# Altium PCB PCBProyecto.PcbDoc
Units mil, origin at the board's own origin, x right, y up, seen from the top; angles counter-clockwise.
Board outline 3530 x 3140 mil, 2 copper layers (Top Layer, Bottom Layer); 37 components, 28 nets, 166 pads, 57 vias.
Unrouted connection lines stored in the file: 2.
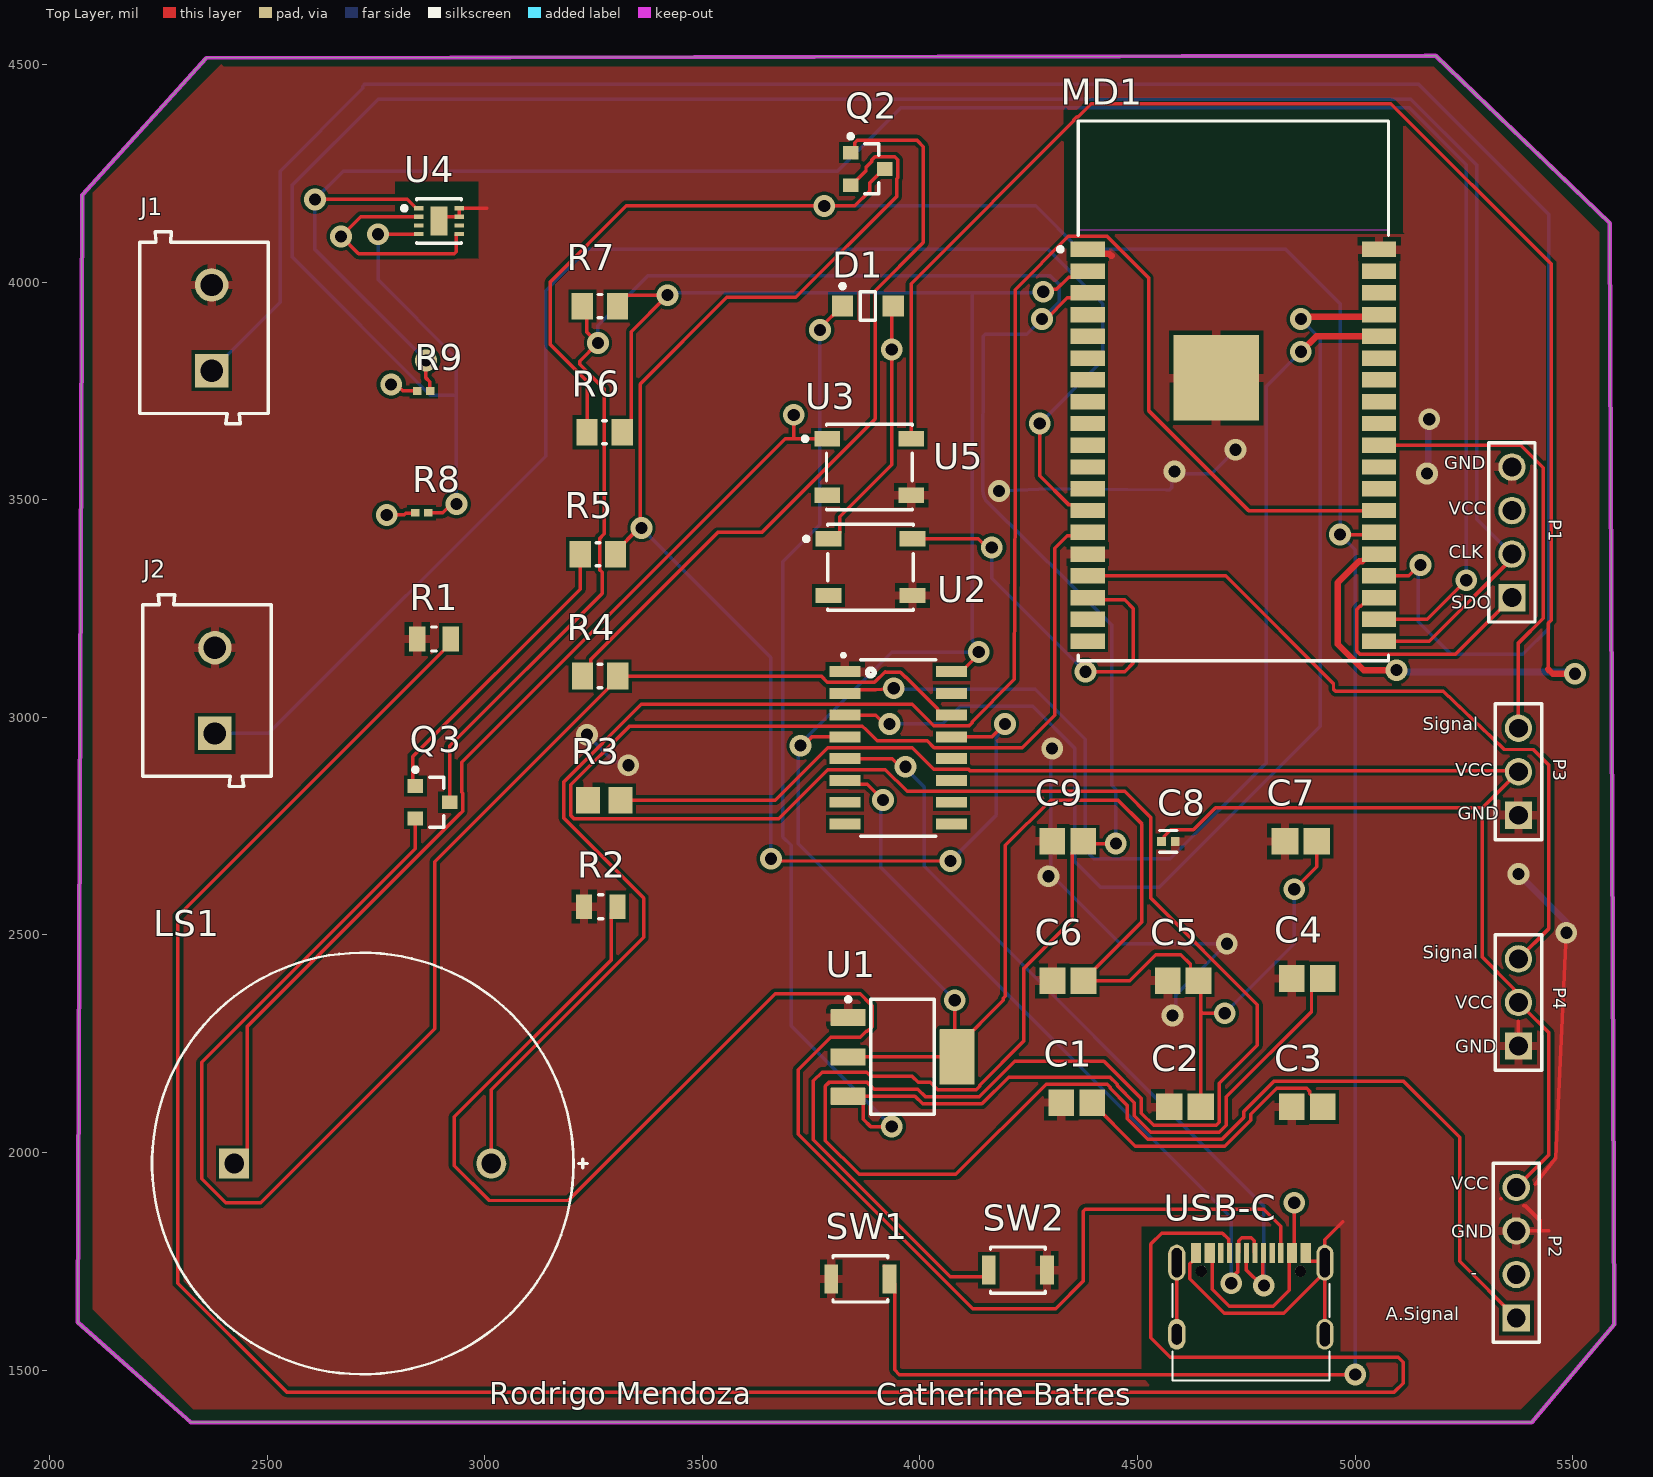
[diagram p0: Top Layer view]
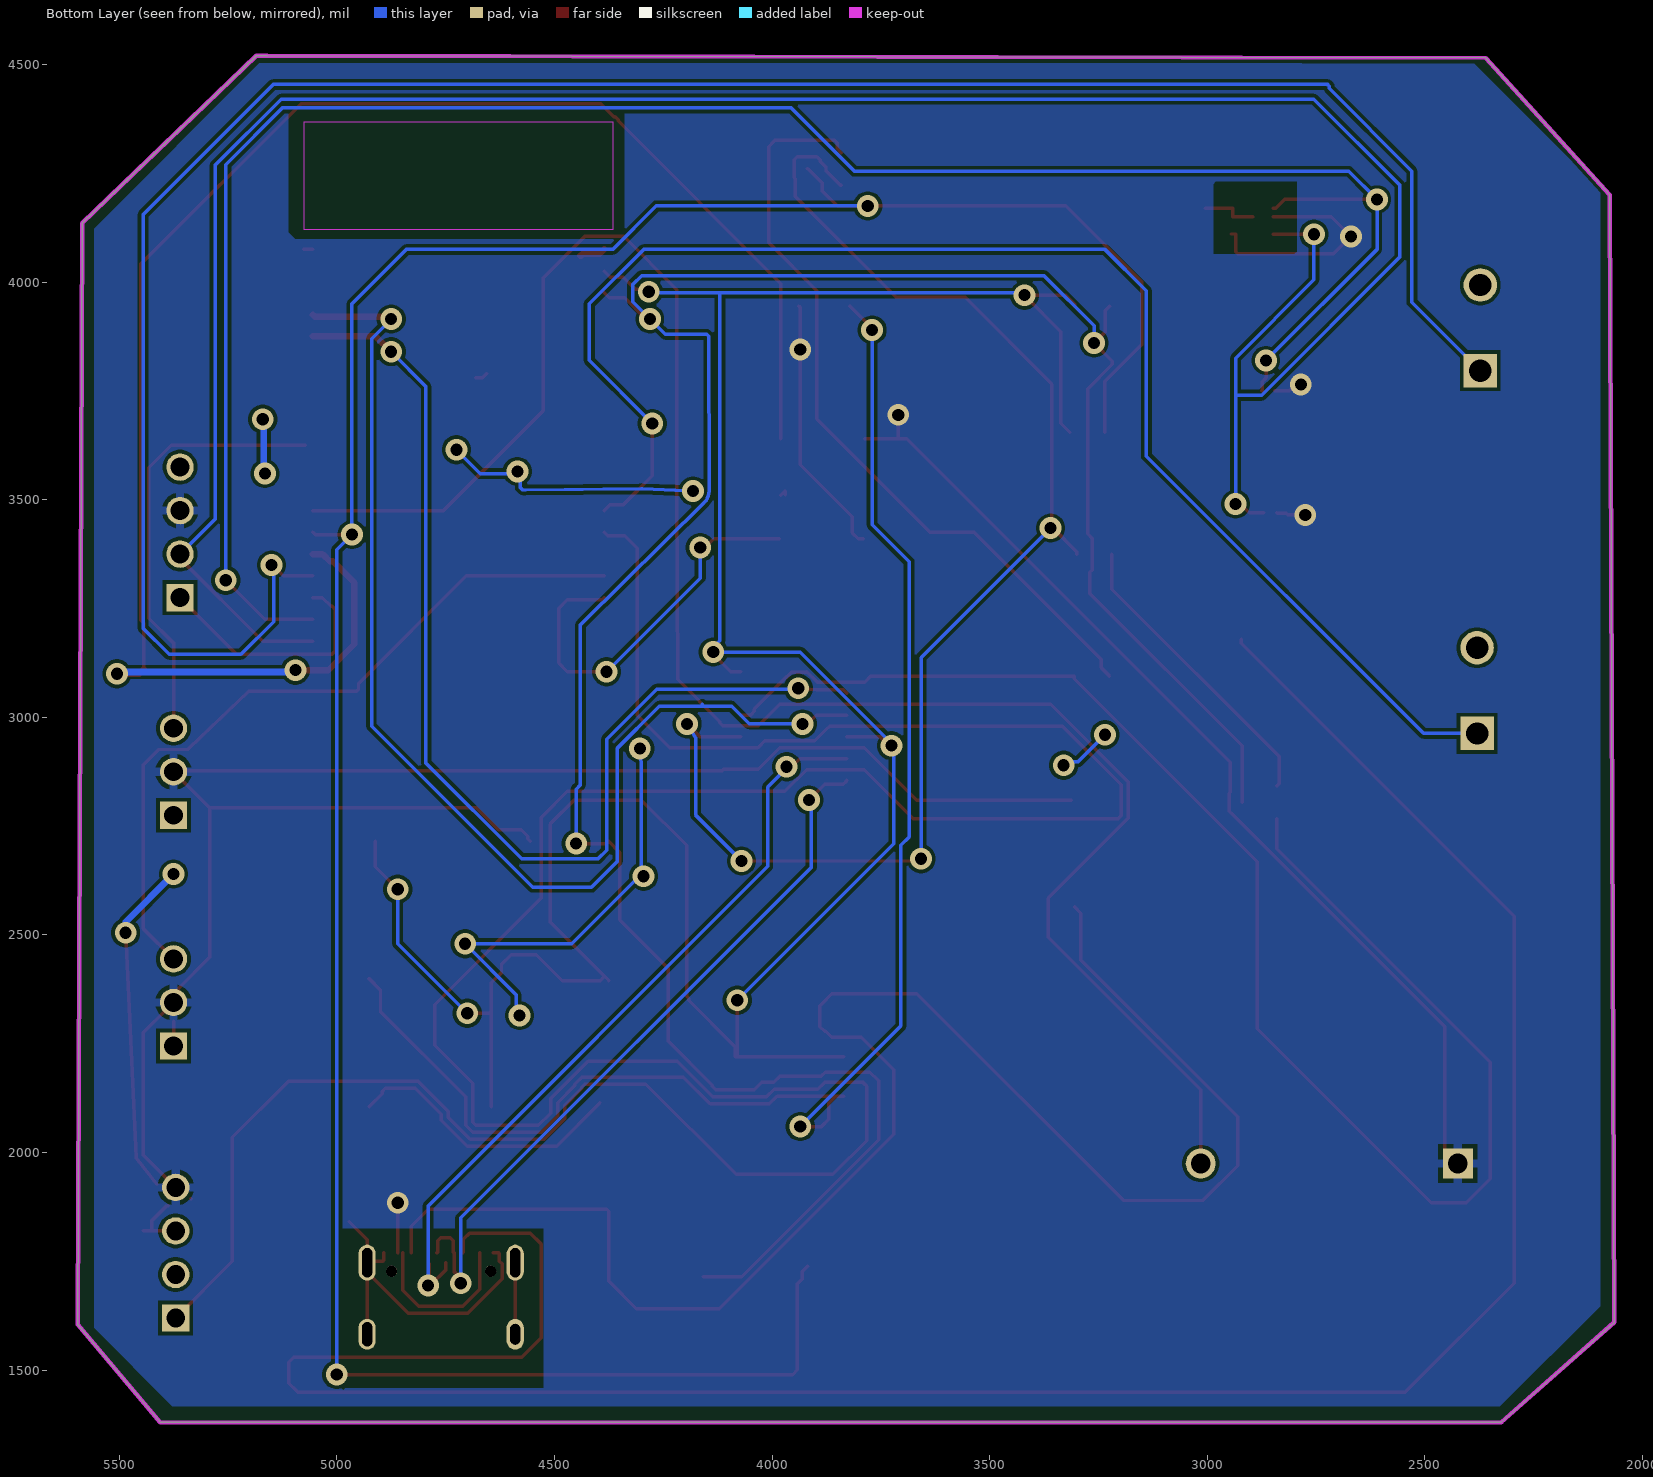
[diagram p1: Bottom Layer view, seen from below]
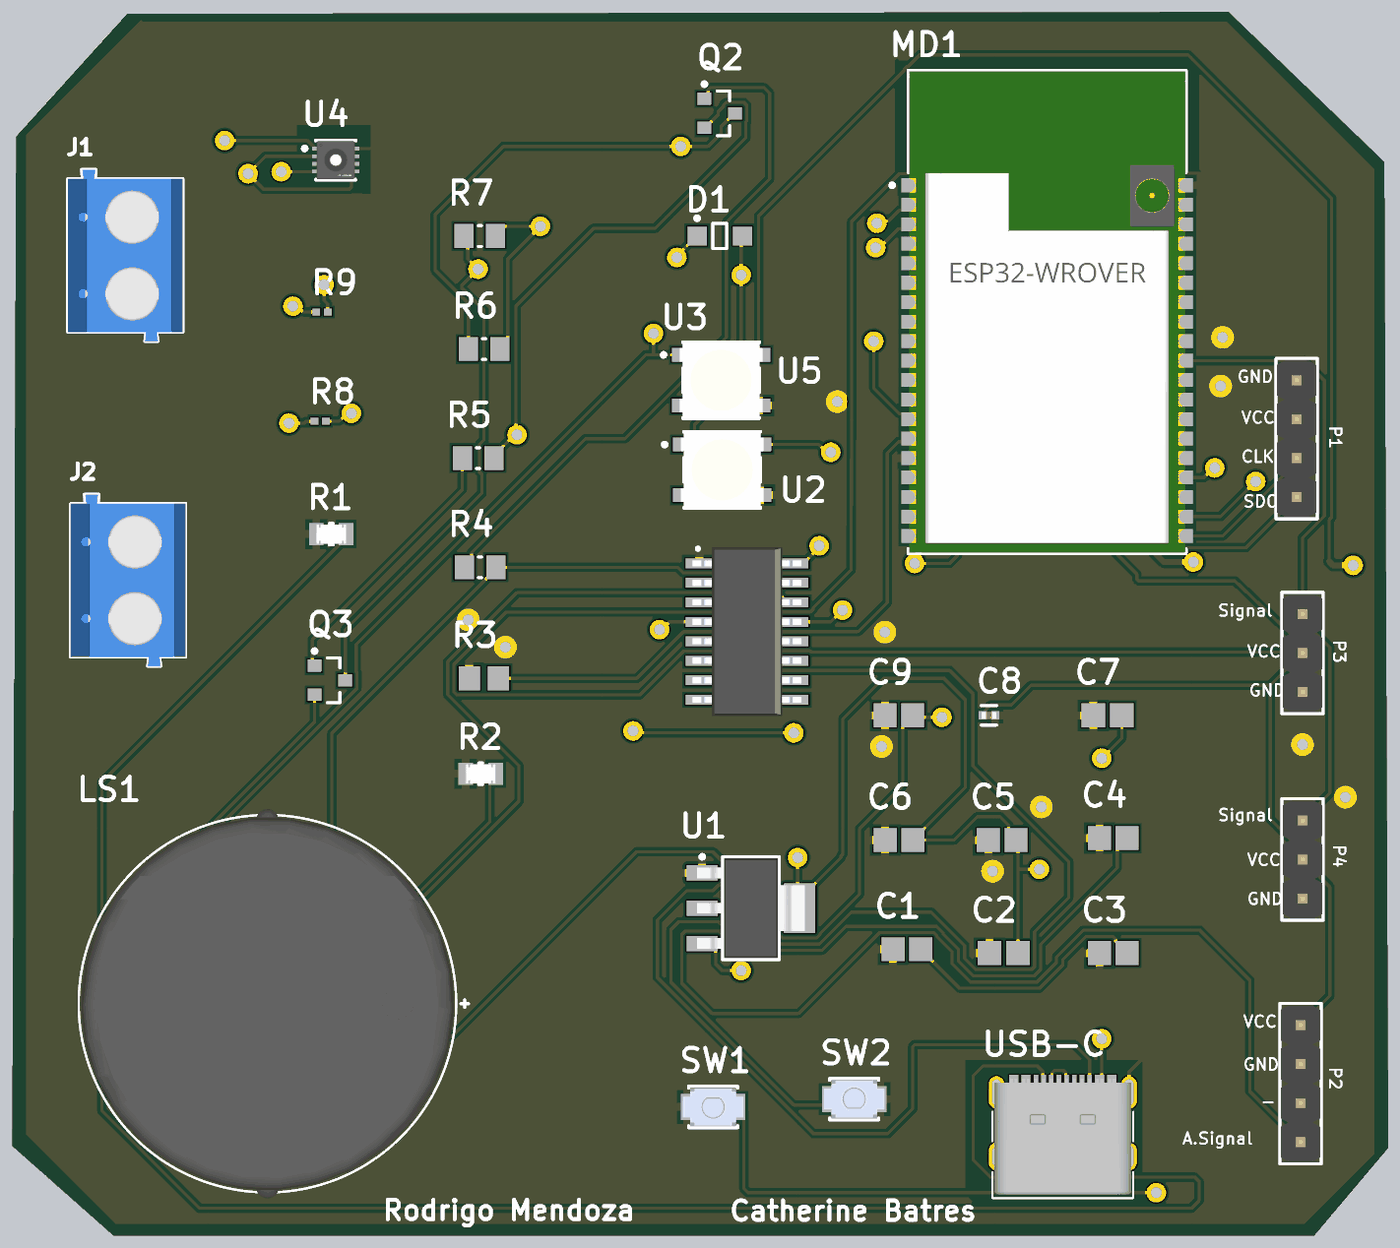
[diagram p2: 3D render of the assembled board from above, using the file's embedded part models]

## Layer stack, top to bottom
Top Solder: solder mask 0.4, Solder Resist, Dk 3.5
Top Layer: signal copper 1.4
Dielectric 1: dielectric 12.6, FR-4, Dk 4.8
Bottom Layer: signal copper 1.4
Bottom Solder: solder mask 0.4, Solder Resist, Dk 3.5

## Board outline
2065,1610 2325,1380 5405,1380 5595,1605 5585,4135 5185,4520 5160,4520 2360,4515 2075,4200

## Design rules (kind name [scope] priority, off if disabled: settings)
BoardOutlineClearance [All] p1: gap=7.87 ignorepadtopadclearanceinfootprint=FALSE except(15.75: Arc-SplitBarrior Arc-SplitContinuation Track-SplitBarrior Track-SplitContinuation SMDPad-SplitBarrior SMDPad-SplitContinuation THPad-SplitBarrior THPad-SplitContinuation Via-SplitBarrior Via-SplitContinuation Fill-SplitBarrior Fill-SplitContinuation Poly-SplitBarrior Poly-SplitContinuation Region-SplitBarrior Region-SplitContinuation Text-SplitBarrior Text-SplitContinuation)
Clearance "Clearance Bottom Layer" [OnLayer('Bottom Layer')] p1: gap=8 ignorepadtopadclearanceinfootprint=TRUE except(10: Arc-Text Track-Text SMDPad-Text THPad-Text Via-Text Fill-Text Poly-Text Region-Text Text-Text)
Clearance "Clearance Top Layer" [OnLayer('Top Layer')] p2: gap=8 ignorepadtopadclearanceinfootprint=TRUE except(10: Arc-Text Track-Text SMDPad-Text THPad-Text Via-Text Fill-Text Poly-Text Region-Text Text-Text)
Clearance [All] p3: gap=7.87 ignorepadtopadclearanceinfootprint=FALSE except(3.5: Arc-Arc Arc-Track Arc-SMDPad Track-Track Track-SMDPad SMDPad-SMDPad; 5: Arc-Via Track-Via SMDPad-Via THPad-Via Via-Via; 10: Arc-Text Track-Text SMDPad-Text THPad-Text Via-Text Fill-Text Poly-Text Region-Text Text-Text)
HoleSize [All] p1: absolutevalues=TRUE maxlimit=248.03 minlimit=7.87 maxpercent=80.000 minpercent=20.000
MinimumAnnularRing [All] p1: minimumring=3
MinimumSolderMaskSliver [All] p1: minsoldermaskwidth=3.94
PolygonConnect PolygonConnect_1 [All] p1: thpad.connectstyle=Relief thpad.reliefconductorwidth=20 thpad.reliefentries=4 thpad.polygonreliefangle="90 Angle" thpad.airgapwidth=10 smdpad.connectstyle=Relief smdpad.reliefconductorwidth=20 smdpad.reliefentries=4 smdpad.polygonreliefangle="90 Angle" smdpad.airgapwidth=10 via.connectstyle=Direct via.reliefconductorwidth=20 via.reliefentries=4 via.polygonreliefangle="90 Angle" via.airgapwidth=10
RoutingCorners [All] p1: cornerstyle=Round minsetback=100 maxsetback=100
RoutingVias [All] p1: holewidth=19.68 width=39.37 viastyle="Through Hole" minholewidth=7.87 minwidth=17.72 maxholewidth=39.37 maxwidth=78.74
SilkToSilkClearance [All] p1: silktosilkclearance=3.94
SilkToSolderMaskClearance [IsPad] p1: minsilkscreentomaskgap=3.94 clearancetoexposedcopper=TRUE
SolderMaskExpansion [All] p1: expansion=4 istentingtop=FALSE
Width [All] p1: maxlimit=100 minlimit=3.5 preferedwidth=15
25 further rules are at their usual default settings.

## Components (designator, comment, footprint, x,y, rotation, side; value= is the part's Value field where it differs from the comment)
C1 "C0805C106K4PACTU" CAPC2013X140X50ML20T25 4360,2115 r0 top
C2 "0.1 uF" CAPC2013X94X50ML20T25 4608.58,2105 r0 top
C3 "C0805C106K4PACTU" CAPC2013X140X50ML20T25 4889.57,2105 r0 top
C4 "10µF" CAPC2013X140X50ML20T25 4889.57,2400 r0 top
C5 "10µF" CAPC2013X140X50ML20T25 4604.57,2395 r0 top
C6 "1µF" CAPC2013X145X50ML20T25 4340,2395 r0 top
C7 "08055C104KAT2A" CAPC2013X94X50ML20T25 4875,2715 r0 top
C8 "C0402C104K8PACTU" FP-C0402-BB-MFG 4570.75,2715 r0 top value="0.10 μF"
C9 "10µF" CAPC2013X145X50ML20T25 4339.57,2715 r0 top
D1 "MBR120ESFT1G" ONSC-SOD-123FL-2-498_V 3880,3945 r0 top
J1 "691102710002" 691102710002 2355,3895 r90 top
J2 "691102710002" 691102710002 2362.28,3061.57 r90 top
LS1 "PKB24SPCH3601-B0" FP-PKB24SPCH3601-B0-MFG 2719.72,1975 r0 top
MD1 "ESP32-WROVER-I" FP-ESP32-WROVER-I-MFG 4720,3750 r0 top
P1 "Pantalla" 61300411121 5360,3425 r90 top
P2 "Humedad Suelo" 61300411121 5370,1770 r90 top
P3 "Nivel" 61300311121 5375,2875 r90 top
P4 "Flujp" 61300311121 5375,2345 r90 top
Q2 "MMBT2222ALT1G" ONSC-SOT-23-3-318-08_V 3880,4260 r0 top
Q3 "MMBT2222ALT1G" ONSC-SOT-23-3-318-08_V 2880,2805 r0 top
R1 "5.1K" FP-CRCW0805-e3-MFG 2883.39,3180 r0 top
R2 "5.1K" FP-CRCW0805-e3-MFG 3266.61,2565 r0 top
R3 "100k" RESC2013X60X40ML20T25 3275,2810 r0 top
R4 "10 k" RESC2013X60X30ML20T20 3265,3095 r0 top
R5 "10 k" RESC2013X60X30ML20T20 3260,3375 r0 top
R6 "10 k" RESC2013X60X30ML20T20 3275.35,3655 r0 top
R7 "10 k" RESC2013X60X30ML20T20 3264.65,3945 r0 top
R8 "10k" RESC1005X40X25LL05T10 2855,3470 r0 top
R9 "10k" RESC1005X40X25LL05T10 2860,3750 r0 top
SW1 "B3U-1000P" FP-B3U-1000P-MFG 3863.07,1710 r0 top
SW2 "B3U-1000P" FP-B3U-1000P-MFG 4225,1730 r180 top
U1 "LM1117MPX-3.3/NOPB" DCY0004A_M 3960,2220 r0 top
U2 "CH340B" CH340B 3950,2930 r0 top
U3 "1655" ADA-RGB-1655_V 3883.54,3575.04 r0 top
U4 "SHT30-DIS-B2.5KS" FP-SHT30-DIS-B2_5KS-MFG 2895,4140 r0 top
U5 "1655" ADA-RGB-1655_V 3886.46,3344.96 r0 top
USB-C "U262-161N-4BVC11" U262-161N-4BVC11 4760,1625 r0 top

## Footprints (in the part's own frame and the unit in brackets; to place one, negate y for a bottom-side part, rotate by r counter-clockwise, add the part's x,y. Pads: shape width x height; smd on the part's side, far side on the other; paste and mask are expansions set on the pad)
61300311121 [mm] "Pin Header, pitch 2.54 mm, THT, Vertical, single row, 3p"
  rect 1.6x1.6 hole 1.1: 1(-2.54,0)
  round 1.6 hole 1.1: 2(0,0) 3(2.54,0)
  silkscreen extent -3.96,-1.35 3.96,1.35, body extent -3.81,-1.27 3.81,1.27, height 8.57
61300411121 [mm] "Pin Header, pitch 2.54 mm, THT, Vertical, single row, 4p"
  rect 1.6x1.6 hole 1.1: 1(-3.81,0)
  round 1.6 hole 1.1: 2(-1.27,0) 3(1.27,0) 4(3.81,0)
  silkscreen extent -5.23,-1.35 5.23,1.35, body extent -5.08,-1.27 5.08,1.27, height 8.57
691102710002 [mm] "5,00mm - modular - blue - Horizontal entry with pressure clamp - 9,9 mm height - 02p"
  rect 1.95x1.95 hole 1.3: 1(-2.5,-0.45)
  round 1.95 hole 1.3: 2(2.5,-0.45)
  silkscreen extent -5.6,-3.75 5.6,3.75, body extent -5.6,-3.75 5.6,3.75, height 9.96
ADA-RGB-1655_V [mm] "SMD, 4-Leads, Body 5x5mm"
  rect 1.5x0.9 smd: 1(-2.45,1.65) 2(-2.45,-1.65) 3(2.45,-1.65) 4(2.45,1.65)
  silkscreen extent -3.87,-2.5 2.5,2.5, body extent -2.7,-2.5 2.7,2.5, height 1.68
CAPC2013X94X50ML20T25 [mm] "Chip Capacitor, 2-Leads, Body 2.01x1.25mm, IPC Low Density"
  rect 1.55x1.55 smd: 1(-0.925,0) 2(0.925,0)
  body extent -1.1,-0.72 1.11,0.72, height 0.94
CAPC2013X140X50ML20T25 [mm] "Chip Capacitor, 2-Leads, Body 2.00x1.25mm, IPC Low Density"
  rect 1.5x1.55 smd: 1(-0.9,0) 2(0.9,0)
  body extent -1.1,-0.72 1.1,0.72, height 1.4
CAPC2013X145X50ML20T25 [mm] "Chip Capacitor, 2-Leads, Body 2.00x1.25mm, IPC Low Density"
  rect 1.5x1.55 smd: 1(-0.9,0) 2(0.9,0)
  body extent -1.1,-0.72 1.1,0.72, height 1.45
CH340B [mm] "- USB 2.0 Transceiver 2Mbps SOP-16_150mil USB ICs ROHS"
  rect 1.8x0.64 smd: 1(-3.105,4.445) 2(-3.105,3.175) 3(-3.105,1.905) 4(-3.105,0.635) 5(-3.105,-0.635) 6(-3.105,-1.905) 7(-3.105,-3.175) 8(-3.105,-4.445) 9(3.105,-4.445) 10(3.105,-3.175) 11(3.105,-1.905) 12(3.105,-0.635) 13(3.105,0.635) 14(3.105,1.905) 15(3.105,3.175) 16(3.105,4.445)
  silkscreen extent -3.3,-5.15 2.2,5.5, body extent -3.56,-5.51 3.56,5.51, height 2.14
DCY0004A_M [mm] "SOT223, 4-Leads, Body 6.7x3.7mm, Pitch 2.3mm, IPC Low Density"
  rrect10% 2.05x1 smd: 1(-3.175,2.3) 2(-3.175,0) 3(-3.175,-2.3)
  rrect5% 2.05x3.25 smd: 4(3.175,0)
  silkscreen extent -3.3,-3.35 1.85,3.47, body extent -3.5,-3.25 3.5,3.25, height 1.62
FP-B3U-1000P-MFG [mm]
  rect 0.8x1.7 smd paste+0 mask+0: 1(-1.7,0) 2(1.7,0)
  silkscreen extent -1.6,-1.35 1.6,1.35, body extent -2.2,-1.45 2.2,1.45, height 0.25
FP-C0402-BB-MFG [mm]
  rect 0.52x0.52 smd paste+0 mask+0: 1(-0.4,0) 2(0.4,0)
  silkscreen extent -0.5,-0.64 0.5,0.64, body extent -0.8,-0.4 0.8,0.4, height 0.25
FP-CRCW0805-e3-MFG [mm]
  rect 0.95x1.45 smd paste+0 mask+0: 1(-0.975,0) 2(0.975,0)
  silkscreen extent -0.13,-0.7 0.13,0.7, body extent -1.55,-0.82 1.55,0.82, height 0.25
FP-ESP32-WROVER-I-MFG [mm]
  rect 2x0.9 smd paste+0 mask+0: 1(-8.5,8.26) 2(-8.5,6.99) 3(-8.5,5.72) 4(-8.5,4.45) 5(-8.5,3.18) 6(-8.5,1.91) 7(-8.5,0.64) 8(-8.5,-0.63) 9(-8.5,-1.9) 10(-8.5,-3.17) 11(-8.5,-4.44) 12(-8.5,-5.71) 13(-8.5,-6.98) 14(-8.5,-8.25) 15(-8.5,-9.52) 16(-8.5,-10.79) 17(-8.5,-12.06) 18(-8.5,-13.33) 19(-8.5,-14.6) 20(8.5,-14.6) 21(8.5,-13.33) 22(8.5,-12.06) 23(8.5,-10.79) 24(8.5,-9.52) 25(8.5,-8.25) 26(8.5,-6.98) 27(8.5,-5.71) 28(8.5,-4.44) 29(8.5,-3.17) 30(8.5,-1.9) 31(8.5,-0.63) 32(8.5,0.64) 33(8.5,1.91) 34(8.5,3.18) 35(8.5,4.45) 36(8.5,5.72) 37(8.5,6.99) 38(8.5,8.26)
  rect 5x5 smd paste+0 mask+0: 39(-1,0.76)
  Keep-Out Layer region: -9,9.4 9,9.4 9,15.7 -9,15.7
  Keep-Out Layer region: -9,9.4 9,9.4 9,15.7 -9,15.7
  silkscreen extent -10.22,-15.75 9.05,15.75, body extent -9.6,-15.85 9.6,15.85, height 0.25
FP-PKB24SPCH3601-B0-MFG [mm]
  rect 1.75x1.75 hole 1.15 paste-1000 mask+0: 1(-7.5,0)
  round 1.75 hole 1.15 paste-1000 mask+0: 2(7.5,0)
  silkscreen extent -12.3,-12.3 13.1,12.3, body extent -12.4,-12.4 12.4,12.4, height 0.25
FP-SHT30-DIS-B2_5KS-MFG [mm]
  rect 0.55x0.25 smd paste-1000 mask-1000: 1(-1.175,0.75) 2(-1.175,0.25) 3(-1.175,-0.25) 4(-1.175,-0.75) 5(1.175,-0.75) 6(1.175,-0.25) 7(1.175,0.25) 8(1.175,0.75)
  rect 1x1.7 smd paste-1000 mask+0: 9(0,0)
  silkscreen extent -2.15,-1.3 1.3,1.3, body extent -1.65,-1.4 1.65,1.4, height 0.25
ONSC-SOD-123FL-2-498_V [mm] "SOD, 2-Leads, Body 2.7x1.65mm"
  rect 1.25x1.22 smd: 1(-1.475,0) 2(1.475,0)
  silkscreen extent -1.6,-0.82 0.45,1.28, body extent -1.35,-0.82 1.35,0.82, height 0.98
ONSC-SOT-23-3-318-08_V [mm] "SOT23, 3-Leads, Body 2.92x1.3mm, Pitch 0.95mm"
  rect 0.9x0.8 smd: 1(-1,0.95) 2(-1,-0.95) 3(1,0)
  silkscreen extent -1.12,-1.46 0.65,2.02, body extent -0.65,-1.46 0.65,1.46, height 1.11
RESC1005X40X25LL05T10 [mm] "Chip Resistor, 2-Leads, Body 1.00x0.50mm, IPC High Density"
  rect 0.5x0.45 smd: 1(-0.375,0) 2(0.375,0)
  body extent -0.53,-0.27 0.53,0.28, height 0.4
RESC2013X60X30ML20T20 [mm] "Chip Resistor, 2-Leads, Body 2.00x1.25mm, IPC Low Density"
  rect 1.25x1.55 smd: 1(-1.025,0) 2(1.025,0)
  silkscreen extent -0.1,-0.67 0.1,0.67, body extent -1.1,-0.72 1.1,0.72, height 0.6
RESC2013X60X40ML20T25 [mm] "Chip Resistor, 2-Leads, Body 2.00x1.25mm, IPC Low Density"
  rect 1.4x1.55 smd: 1(-0.95,0) 2(0.95,0)
  body extent -1.1,-0.72 1.1,0.72, height 0.6
U262-161N-4BVC11 [mm] "USB-C"
  rect 0.3x1.15 smd: A1(-3.35,3.67) A4(-2.55,3.67) A5(-1.25,3.67) A6(-0.25,3.67) A7(0.25,3.67) A8(1.25,3.67) A9(2.55,3.67) A12(3.35,3.67) B1(3.05,3.67) B4(2.25,3.67) B5(1.75,3.67) B6(0.75,3.67) B7(-0.75,3.67) B8(-1.75,3.67) B9(-2.25,3.67) B12(-3.05,3.67)
  rrect100% 1x1.8 hole 1.2 slot 0.6 at 0 deg: S1(-4.32,-1.075)
  rrect100% 1x2.1 hole 1.7 slot 0.6 at 0 deg: S2(-4.32,3.105) S3(4.32,3.105)
  rrect100% 1x1.8 hole 1.4 slot 0.6 at 0 deg: S4(4.32,-1.075)
  round 0.65 hole 0.65: Un1(2.89,2.605) Un2(-2.89,2.605)
  silkscreen extent -4.58,-3.78 4.58,1.85, body extent -4.45,-3.55 4.45,4.01, height 3.33

## Part data
C1 C3 C4 C5: library part CMP-2007-03242-1, "10µF ±10% 16V Ceramic Capacitor X5R 0805 (2012 Metric)", Part Number=CL21A106KOQNNNG
C2 C7: library part CMP-2000-05016-1, "Chip Capacitor, Ceramic, 0.1 uF, 10%, 50 V, 0805, RoHS, Tape and Reel", Capacitance=100nF, Case Size/Dimension=0805, Dielectric=X7R, Manufacturer=AVX, Rated Voltage=50V, Tolerance (%)=±10%, Datasheet URL=http://www.farnell.com/datasheets/319609.pdf, Datasheet Version=Sep-07, Manufacturer URL=http://www.avx.com/
C6: library part CMP-2007-01082-1, "1µF ±10% 16V Ceramic Capacitor X7R 0805 (2012 Metric)", Manufacturer=Kemet, Part Number=C0805C105K4RAC7800
C8: library part CMP-2008-02046-2, "CAP CER 0.1UF 10V X5R 0402", Capacitance="0.10 μF", Manufacturer=Kemet, Package=C0402-BB, Temperature="-55°C to +125°C", Temperature Characteristic=X5R, Temperature Coefficient=15%, Temperature Range High=+125°C, Temperature Range Low=-55°C, Tolerance=0.1, Voltage Rating="10 V", Automotive=No, Category=Cap, ComponentLink2Description=Datasheet, ComponentLink2URL=https://content.kemet.com/datasheets/KEM_C1002_X7R_SMD.pdf, Device Class L1="Passive Components", Device Class L2=Capacitors, Device Class L3="Ceramic Capacitors", Digikey Description="CAP CER 0.1UF 10V X5R 0402", Height=0.55mm, Ipc Land Pattern Name=CAPC10050X50, Lead Free=Yes, Manufacturer Part Number=C0402C104K8PACTU, Material=Ceramic, Mouser Description="Capacitor 100 nF 10 VDC 0402", Octopart=https://octopart.com/c0402c104k8pactu-kemet-140039, RoHS=TRUE
C9: library part CMP-2007-01082-1, "10µF ±10% 16V Ceramic Capacitor X7R 0805 (2012 Metric)", Manufacturer=Kemet, Part Number=C0805C105K4RAC7800
D1: library part CMP-1055-00434-1, "Schottky Power Rectifier, 2-Pin SOD-123, Pb-Free, Tape and Reel", Manufacturer="On Semiconductor", ComponentLink1Description="Manufacturer URL", ComponentLink1URL=http://www.onsemi.com/, ComponentLink2Description=Datasheet, ComponentLink2URL=http://www.onsemi.cn/pub_link/Collateral/MBR120ESFT1-D.PDF, ComponentLink3Description="Package Specification", ComponentLink3URL=http://www.onsemi.com/pub_link/Collateral/498-01.PDF, Configuration=Single, DatasheetVersion="Rev. 4", IFSM Max (A)=40, Mounting Technology="Surface Mount", PackageDescription="2-Pin SOD, Body 1.65 x 2.7 mm", PackageReference=SOD-123FL-2-498, PackageVersion="Rev. D, 05/2013", Packing="Tape and Reel", PartNumber=MBR120ESFT1G, RoHS=TRUE
J1 J2: library part CMP-1502-03258-1, "Series 102 - 5.00 mm Horizontal Entry Modular with Pressure Clamp WR-TBL, 2 pin", Manufacturer="Wurth Elektronik", Operating Temperature=-40to105degC, Datasheet URL=http://katalog.we-online.de/em/datasheet/6911027100xx.pdf, Manufacturer URL=http://www.we-online.de, Mounting Technology=THT, Package Reference=691102710002, Packaging=Box, Part Number=691102710002, Pin Number=2, Pitch=5.00mm, Publisher=WurthElektronik
LS1: library part CMP-06203-000001-2, "AUDIO PIEZO TRANSDUCER 3-15V TH", Frequency=3.6kHz, Max Frequency=4.1kHz, Max Operating Temperature=70°C, Max Supply Current=16mA, Max Supply Voltage=15V, Min Operating Temperature=-20°C, Min Supply Voltage=3V, Nominal Supply Voltage (DC)=12V, Package Quantity=650, Diameter=24.3mm, Height=9.7mm, Lead Free="Lead Free", Length=24.3mm, Max Supply Voltage (DC)=15V, Min Supply Voltage (DC)=3V, Mount=Flush, Nominal Supply Current=16mA, Operating Supply Current=16mA, Packaging=Bulk, Radiation Hardening=No, REACH SVHC="No SVHC", Self Resonant Frequency=3.6kHz, Termination="PC Pins", Voltage Rating=12V, Voltage Rating (DC)=15V, Washable=No
MD1: library part CMP-194065-000001-1, "SMD MODULE, ESP32-D0WDQ6, 32MBIT", Manufacturer=Espressif, Max Frequency=2484MHz, Max Supply Voltage=3.6V, Min Supply Voltage=2.3V, Nominal Supply Current=500mA, Temperature="-40°C to +85°C", Temperature Range High=+85°C, Temperature Range Low=-40°C, Automotive=No, Category=UNK, ComponentLink2Description=Datasheet, ComponentLink2URL=https://www.espressif.com/sites/default/files/documentation/esp32-wrover_datasheet_en.pdf, Data Rate=150Mbits/s, Device Class L1="Integrated Circuits (ICs)", Device Class L2="RF Semiconductors and Devices", Device Class L3=Transceivers, Digikey Description="SMD MODULE, ESP32-D0WDQ6, 32MBIT", Height=3.4mm, Interface=I2C,SPI,UART,I2S,Other, Lead Free=Yes, Manufacturer Part Number=ESP32-WROVER-I, Number Of Adc Channels=16, Number Of Gpio=20, Octopart=https://octopart.com/esp32-wrover-i-espressif+systems-89171349, Package=ESP32-WROVER-I, RoHS=TRUE, Sensitivity=-98dBm
P1 P2: library part CMP-1502-01064-1, "THT Vertical Pin Header WR-PHD, Pitch 2.54 mm, Single Row, 4 pins", Contact Resistance=20mOhm, Manufacturer="Wurth Elektronik", Operating Temperature=-40to105degC, Package Reference=61300411121, Rated Current=3A, Withstanding Voltage=500VAC, Working Voltage=250VAC, Datasheet URL=https://katalog.we-online.de/em/datasheet/6130xx11121.pdf, Gender=Male, Manufacturer URL=http://www.we-online.de, Mounting Technology=THT, Orientation=Vertical, Packaging=Bag, Part Number=61300411121, Pin Number=4, Pitch=2.54mm, Publisher=WurthElektronik, Row Number=Single
P3 P4: library part CMP-1502-01062-1, "THT Vertical Pin Header WR-PHD, Pitch 2.54 mm, Single Row, 3 pins", Contact Resistance=20mOhm, Manufacturer="Wurth Elektronik", Operating Temperature=-40to105degC, Package Reference=61300311121, Rated Current=3A, Withstanding Voltage=500VAC, Working Voltage=250VAC, Datasheet URL=https://katalog.we-online.de/em/datasheet/6130xx11121.pdf, Gender=Male, Manufacturer URL=http://www.we-online.de, Mounting Technology=THT, Orientation=Vertical, Packaging=Bag, Part Number=61300311121, Pin Number=3, Pitch=2.54mm, Publisher=WurthElektronik, Row Number=Single
Q2 Q3: library part CMP-1048-00538-1, "General Purpose Transistor, NPN Silicon, 3-Pin SOT-23, Pb-Free, Tape and Reel", Manufacturer="On Semiconductor", ComponentLink1Description="Manufacturer URL", ComponentLink1URL=http://www.onsemi.com/, ComponentLink2Description=Datasheet, ComponentLink2URL=http://www.onsemi.cn/pub_link/Collateral/MMBT2222LT1-D.PDF, ComponentLink3Description="Package Specification", ComponentLink3URL=http://www.onsemi.cn/pub_link/Collateral/318-08.PDF, DatasheetVersion="Rev. 10", fT Min (MHz)=300, IC Continuous (A)=0.6, Mounting Technology="Surface Mount", PackageDescription="3-Pin Small Outline Transistor, Body 2.92 x 1.3 mm, Pitch 0.95 mm", PackageReference=SOT-23-3-318-08, PackageVersion="Rev. AP, 11/2009", Packing="Tape and Reel", PartNumber=MMBT2222ALT1G, Polarity=NPN, RoHS=TRUE
R1 R2: library part CMP-2001-04024-2, "RES Thick Film, 5.1kΩ, 1%, 0.125W, 100ppm/°C, 0805", Case Code (Imperial)=0805, Case Code (Metric)=2012, Max Operating Temperature=155°C, Max Power Dissipation=125mW, Min Operating Temperature=-55°C, Package Quantity=10, Resistance=5.1kR, Temperature Coefficient=100ppm/°C, Tolerance=1%, Voltage Rating=150V, Case/Package=0805, Composition="Thick Film", Contact Plating=Tin, Depth=1.25mm, Features="Automotive AEC-Q200", Height=0.45mm, Lead Free="Lead Free", Length=2mm, Military Standard=Not, Mount="Surface Mount", Number of Terminations=2, Packaging="Tape and Reel", Power Rating=125mW, Radiation Hardening=No, Termination=SMD/SMT, Voltage Rating (DC)=150V, Weight=0.000194oz, Width=0.049inch
R3: library part CMP-2001-00583-1, "100 kOhms ±0.1% 0.125W, 1/8W Chip Resistor 0805 (2012 Metric) Automotive AEC-Q200 Thin Film", Manufacturer=Panasonic, Part Number=ERA6AEB104V
R4 R5 R6 R7: library part CMP-2001-04657-1, "10 kOhms ±5% 0.25W, 1/4W Chip Resistor 0805 (2012 Metric) Automotive AEC-Q200, Moisture Resistant Thick Film", Manufacturer="KOA Speer", Part Number=RK73B2ATTD103J
R8 R9: library part CMP-2002-07353-1, Manufacturer="Yageo / Phycomp", Part Number=RC0402FR-0710KL
SW1 SW2: library part CMP-2100-03586-2, "SWITCH TACTILE SPST-NO 0.05A 12V", Contact Current Rating=50mA, Contact Resistance=100mR, Insulation Resistance=100MR, Max Operating Temperature=70°C, Max Voltage Rating (DC)=12V, Min Operating Temperature=-25°C, Operating Force=1.5N, Package Quantity=1, Ratings="Dust Proof", Actuator Length=0.4mm, Actuator Type=Standard, Contact Material=Silver, Current Rating=50mA, Depth=2.5mm, Electrical Life=200000Cycles, Height=1.2mm, Illumination Type=Non-Illuminated, Lead Free="Lead Free", Length=4mm, Max Current Rating=50mA, Mechanical Life=200000Cycles, Mount="Surface Mount", Orientation=Straight, Packaging="Tape and Reel", Switch Function=Off-Mom, Switch Travel=0.15mm, Termination=SMD/SMT, Throw Configuration=SPST, Voltage Rating (DC)=12V, Weight=0.000776oz, Width=3mm
U1: library part CMP-0062-01639-4, "800mA Low-Dropout Linear Regulator, 4-pin SOT-223, Pb-Free", Manufacturer="Texas Instruments", PackageTopMarking=XYTT*N05A, PowerWise=N, Code_IPC=SOT223-4, Code_JEDEC=TO-261-AA, ComponentLink1Description="Datasheet URL", ComponentLink1URL=http://www.ti.com/general/docs/lit/getliterature.tsp?genericPartNumber=LM1117-N&fileType=pdf, CompType="LDO IC", High-Reliability=Y, PackageDescription="Molded SOT-223, 6.50 x 3.56 x 1.6mm Body, 4 Lead, 2.3mm Pitch", PackageReference=DCY0004A, PartNumber=LM1117MPX-3.3/NOPB, PinCount=4, RoHS=Y
U2: "- USB 2.0 Transceiver 2Mbps SOP-16_150mil USB ICs ROHS", ComponentLink1Description=Datasheet, ComponentLink1URL=https://www.mpja.com/download/35227cpdata.pdf
U3 U5: library part CMP-2000-05026-1, "Intelligent Control LED Integrated Light Source, 3.5 to 5.3 V, -25 to 80 degC, 4-Pin SMD, RoHS, Tape and Reel", Color=Red,Green,Blue(RGB), Manufacturer=Adafruit-Industries-LLC, Package Description="4-Pin Surface Mount Device, Body 5 x 5 mm", Category=Optoelectronics, Configuration=Discrete, Controller Type=-, Datasheet URL=http://datasheet.octopart.com/ADA1655-Adafruit-Industries-datasheet-32028139.pdf, Datasheet Version=May-13, Family=Addressable,Specialty, Interface=-, Manufacturer URL=https://www.adafruit.com/, Mounting Type=SurfaceMount, Number of LEDs=10, Package Reference=1655, Series=Neopixel, Size / Dimension=5.00mmLx5.00mmW, Utilized LED=WS2812(5050)
U4: library part CMP-144040-000006-1, "SENSOR HUMID/TEMP 5V I2C 3% SMD"
USB-C: "USB - Type C Female 16 SMT USB Connectors RoHS", ComponentLink1Description=datasheet, ComponentLink1URL=https://datasheet.lcsc.com/szlcsc/2002271811_XKB-Connectivity-U262-161N-4BVC11_C319148.pdf, ComponentLink2Description="LCSC Link", ComponentLink2URL=https://lcsc.com/product-detail/USB-Connectors_XKB-Connectivity-U262-161N-4BVC11_C319148.html

## Via types
v1: diameter 50, hole 28, Top Layer to Bottom Layer, 57 vias

## Nets (pads, with @x,y where several pads share a name; then routed paths per layer and width w, separated by ;. In a path a pad name is that pad's centre, name@x,y a point inside that pad or via, vN(x,y) a via of type N, cw(c..) or ccw(c..) an arc to the next point about the centre after c; other vN are vias at no path point)
3V3: C2.2 C5.2 C6.2 C7.2 MD1.2 R6.2 R7.2 U1.2 U1.4 U2.4 U2.16 | length 6599.7
  Top Layer w8: R7.2 3305,3949.39 3325.61,3970 v1(3420,3970) 3336.32,3886.32 3336.32,3675.61 R6.2 ; v1(3725.68,2935) 3731.37,2935 3751.37,2955 U2.4 ; U1.2 U1.4 ; U2.16 4095.08,3105 4135,3144.92 v1(4135,3150) ; v1(4080,2350) 4080,2225 U1.4 ; v1(4283,3978) 4288.66,3983.66 4313.66,3983.66 4341.48,4011.48 4371.64,4011.48 MD1.2 ; C6.2 4375.43,2395.98 4384.72,2405.28 4510,2530.55 4510,2755 4455,2810 4300,2810 4195.91,2705.91 4195.91,2359.22 4191.22,2354.53 4191.22,2349.84 4085,2243.62 U1.4 ; C6.2@4385.22,2404.78 4395,2395 4481.63,2395 4541.63,2455 4599.3,2455 4621.48,2432.83 4621.48,2413.52 4645,2390 4645,2325 ; C2.2 4645,2325 ; v1(4700,2320) 4650,2320 4645,2325 ; v1(4860,2605) 4911.42,2656.42 C7.2
  Bottom Layer w8: v1(3420,3970) 3425,3975 4120,3975 ; v1(4080,2350) 3720,2710 3720,2929.32 v1(3725.68,2935) 3725.68,2940.68 3935,3150 v1(4135,3150) 4135,3160.69 4120,3175.69 4120,3975 ; v1(4283,3978) 4280,3975 4120,3975 ; v1(4700,2320) 4860,2480 v1(4860,2605)
Buzz: LS1.2 MD1.26 | length 4498
  Top Layer w8: LS1.2 3015,1990 3010,1995 3015,2000 3015,2144.5 3365,2494.5 3365,2584.93 3182.04,2767.89 3182.04,2852.11 3359.71,3029.78 3982.46,3029.78 4031.84,2980.4 4112.65,2980.4 4119.68,2987.43 4119.68,2990.26 4214.56,3085.14 4216.9,3087.48 4218.44,3519.8 ccw(c4183.44,3520) 4218.44,3520.12 4218.44,3982.34 4341.01,4104.91 4429.69,4104.91 4436.72,4097.88 4525,4009.61 4525,3705 4754.8,3475.2 MD1.26
"Carga 1": J2.1 MD1.13 | length 3410.9
  Top Layer w8: J2.1@2385.95,2948.86 2385.95,2957.2 J2.1 2388.86,2963.15 J2.1@2397.28,2971.57 ; v1(4275,3675) 4275,3555 4341.09,3488.91 4371.64,3488.91 MD1.13
  Bottom Layer w8: J2.1 2503.15,2963.15 3140,3600 3140,3980 3235,4075 4295,4075 4420,3950 4420,3820 v1(4275,3675)
"Carga 2": J1.1 MD1.23 | length 5191.6
  Top Layer w8: MD1.23 5122.48,3325.2 5147.28,3350 v1(5150,3350)
  Bottom Layer w8: J1.1 2530,3953.86 2530,4255 2720,4445 2720,4450.31 2723.76,4454.07 5145.93,4454.07 5445,4155 5445,3205 5385,3145 5220,3145 5145,3220 5145,3345 v1(5150,3350)
CLK: MD1.20 P1.2 R8.2 U4.4 | length 5722.5
  Top Layer w8: v1(2755,4110) 2755.24,4110.24 2848.5,4110.24 U4.4 ; R8.2 2903.63,3470 2923.63,3490 v1(2935,3490) ; MD1.20 5170.2,3175.2 5360,3365 P1.2
  Bottom Layer w8: v1(2755,4110) 2755,4005 2935,3825 2935,3740 ; v1(2935,3490) 2935,3740 ; P1.2 5279.61,3455.39 5279.61,4268.02 5127.63,4420 2755,4420 2558.31,4223.31 2558.31,4056.69 2875,3740 2935,3740
D+: U2.5 USB-C.A6 USB-C.B6 | length 1800.6
  Top Layer w8: U2.5 3936.46,2905 3955.05,2886.41 v1(3966.41,2886.41) ; 4750,1746.65 4750,1730 4785,1695 v1(4790,1695) 4787.62,1697.38 4787.62,1744.58
  Bottom Layer w8: v1(3966.41,2886.41) 3966.41,2883.59 4010,2840 4010,2657.5 4790,1877.5 v1(4790,1695)
D-: U2.6 USB-C.A7 USB-C.B7 | length 1725.6
  Top Layer w8: U2.6 3836.35,2846.4 3878.6,2846.4 v1(3915,2810) ; v1(4715,1700) 4715,1711.37 4730.47,1726.84 USB-C.B7 4732.25,1771.27 4732.25,1797.1 4739.28,1804.13 4761.03,1804.13 4768.06,1797.1 4768.06,1771.27 USB-C.A7
  Bottom Layer w8: v1(3915,2810) 3910,2805 3910,2655 4715,1850 v1(4715,1700)
DTR: Q2.2 R5.2 U2.13 | length 3217.4
  Top Layer w8: R5.2 3300.35,3380.91 3354.45,3435 v1(3360,3435) 3357.22,3437.78 3357.22,3765.78 3556.33,3964.88 3714.88,3964.88 3947.09,4197.09 3947.09,4237.28 3949.09,4239.28 3949.09,4280.72 3942.06,4287.75 3896.68,4287.75 3889.65,4280.72 3889.65,4277.89 3875.93,4264.17 3875.93,4255.93 3842.6,4222.6 Q2.2 ; v1@3655,2675 v1(3657.5,2675) 3660,2675 3665,2670 v1(4070,2670) ; U2.13 4165,2955 v1(4195,2985)
  Bottom Layer w8: v1(3360,3435) 3657.5,3137.5 v1(3657.5,2675) ; v1(4070,2670) 4175.71,2775.71 4175.71,2946.72 4175.71,2953.35 v1(4195,2985)
Flujo: MD1.16 P4.3 | length 1719.2
  Top Layer w8: MD1.16 4702.11,3325.2 4950,3077.3 4950,3064.69 4954.69,3060 5200,3060 5201.98,3059.67 5340.2,2928.37 5342.52,2926.17 5408.83,2926.17 5445,2890 5445,2515 P4.3
GND: C1.1 C2.1 C3.1 C4.1 C5.1 C6.1 C7.1 C8.2 C9.1 J1.2 J2.2 MD1.1 MD1.15 MD1.38 MD1.39 P1.4 P2.3 P3.1 P4.1 R1.1 R2.1 R3.1 SW1.1 SW2.1 U1.1 U2.1 U3.3 U4.7 U4.8 U4.9 U5.3 USB-C.A1 USB-C.A12 USB-C.B1 USB-C.B12 USB-C.S1 USB-C.S2 USB-C.S3 USB-C.S4 | length 4128.7
  Top Layer w8: J1.2 2365,4001.14 2365,4005 J1.2@2376.57,3993.43 ; U4.9@2895,4150 2895.16,4149.84 U4.7 U4.8 3004.53,4169.53 3005,4170 ; U3.3@3970,3511.89 3970,3520 3979.92,3510.08 U3.3 ; USB-C.S2@4575.43,1770 4589.92,1755.51 USB-C.S2 USB-C.S2@4589.92,1725 ; USB-C.S1 USB-C.S2@4589.92,1725 ; USB-C.S2@4590.3,1725 USB-C.S2@4589.92,1725 ; USB-C.B12 USB-C.A1 4626.2,1767.58 4626.2,1750.85 4620,1744.65 4620,1710.2 4699.2,1631 4835.49,1631 USB-C.S3@4930.08,1725.59 ; MD1.39@4655,3790 4665.08,3779.92 MD1.39 ; USB-C.A12 4891.89,1752.76 4893.8,1750.85 4926.47,1750.85 USB-C.S3 ; USB-C.S4 USB-C.S3@4930.08,1725.59 ; 4971,1841 4930.08,1800.08 USB-C.S3 ; MD1.38 MD1.38@5076.3,4075.2 ; 5334.76,1894.5 5335.03,1894.13 ; P2.3 P2.3@5386,1820 ; P4.1 5375,2301.5 ; P2.3@5376.63,1841 5386,1831.63 P2.3@5386,1820 ; 5387.19,1878.5 5389.98,1878.5 5425.5,1842.99 5425.5,1820 ; 5412.95,1926.89 5461,1988.37 v1(5485,2505) ; 5445,1820 5425.5,1820 ; USB-C.S3@4930.08,1725.59 USB-C.S3 ; P2.3@5386,1820 5425.5,1820
  Top Layer w15: MD1.1 4395.57,4064.98 4435.02,4064.98 4440,4060
  Bottom Layer w8: v1(3235,2960) 3296.96,2898.04 3321.96,2898.04 v1(3330,2890) ; v1(4181.44,3519.99) 4222.44,3521.68 4298.49,3524.97 cw(c4300,3490) 4300.35,3525 4565.72,3522.34 4572.34,3522.34 4578,3528 4578,3558 v1(4585,3565) 4590,3560 4670,3560 v1(4725,3615) ; v1(4303.59,2928.59) 4300,2894.21 4300,2887.59 4300,2640 v1(4295,2635) 4305,2635 4460,2480 v1(4705,2480) 4588.04,2363.04 4588.04,2323.04 v1(4580,2315)
  Bottom Layer w15: v1(5165,3560) 5167.5,3562.5 5167.5,3682.5 v1(5170,3685) ; v1(5375,2640) 5485,2530 v1(5485,2505)
GPIO0: MD1.25 Q2.3 R6.1 SW1.2 | length 6428
  Top Layer w8: R6.1 3235,3771.87 3150,3856.87 3150,4000 3325,4175 v1(3780,4175) 3850,4175 3884.07,4209.07 3884.07,4226.67 3917.4,4260 Q2.3 ; SW1.2@3918.25,1739.46 3930,1727.72 SW1.2 3941.75,1698.25 3941.75,1501.04 3952.79,1490 v1(5000,1490) ; v1(4965,3420) 5049.45,3420 MD1.25
  Bottom Layer w8: v1(3780,4175) 4265.68,4175 4365.68,4075 4840,4075 4965,3950 4965,3411.6 4973.4,3411.6 5000,3385 v1(5000,1490)
Humedad: MD1.14 P2.1 | length 7427.9
  Top Layer w8: MD1.14 4377.63,3417.47 4338.67,3417.47 4310,3388.8 4310,3005 4235,2930 4032.24,2930 4016.24,2946 3901.76,2946 3875.19,2972.57 3867.76,2980 3332.56,2980 3198.04,2845.48 3198.04,2774.52 3205.07,2767.49 3675.24,2767.49 3787.75,2880 3920.5,2880 3970.5,2830 4470,2830 4529.61,2770.39 4529.61,2585.39 4775.03,2339.97 4775.03,2247.01 4687.51,2159.49 4687.51,2069.52 4680.48,2062.49 4536.68,2062.49 4508.27,2090.91 4508.27,2124.43 4422.7,2210 4217.75,2210 4135.77,2128.02 4012.58,2128.02 3995.16,2145.45 3894.86,2145.45 3879.17,2161.13 3790.83,2161.13 3782.65,2152.95 3782.65,2027.35 3860,1950 4082.56,1950 4290.07,2157.51 4429.93,2157.51 4436.96,2150.48 4436.96,2147.65 4476.27,2108.35 4476.27,2077.65 4523.43,2030.49 4693.74,2030.49 4744,2080.75 4744,2094.5 4813.01,2163.51 5111.49,2163.51 5239.68,2035.32 5239.68,1750.32 P2.1
Neo: MD1.24 U3.4 | length 3989.6
  Top Layer w8: U3.4 3980,3996.58 4353.67,4370.25 4353.67,4373.08 4360.7,4380.11 4363.53,4380.11 4393.42,4410 5081.64,4410 5450,4041.64 5450,3223.23 5443.5,3216.73 5443.5,3110 ; v1@5504.23,3100.77 v1(5505,3100)
  Top Layer w15: MD1.24 5032.99,3375.2 5016.21,3358.41 5008.86,3358.41 4960,3309.56 4960,3168.21 5019.73,3108.48 v1(5095,3108.48) ; 5443.5,3110 5453.5,3100 v1(5505,3100)
  Bottom Layer w15: v1(5095,3108.48) 5099.24,3104.24 5500.76,3104.24 v1(5505,3100)
Neo2: MD1.17 U5.4 | length 922.8
  Top Layer w8: U5.4 4133.71,3409.92 4153.63,3390 v1(4165,3390) ; v1(4380,3105) 4470,3105 4490,3125 4490,3250 4470,3270 4390.55,3270 MD1.17
  Bottom Layer w8: v1(4165,3390) 4165,3320 v1(4380,3105)
NetC1_2: C1.2 C3.2 | length 656.1
  Top Layer w8: C1.2 4395.43,2114.02 4494.96,2014.49 4700.36,2014.49 4760,2074.12 4760,2087.88 4819.64,2147.51 4888.63,2147.51 4895.66,2140.48 4895.66,2135.32 4925,2105.98 C3.2
NetC4_2: C4.2 D1.1 U1.3 | length 3587.7
  Top Layer w8: v1(3770,3890) 3770,3893.66 3821.34,3945 D1.1 ; U1.3 U1.3@3853.7,2129.45 ; v1(3935,2060) 3886.37,2060 3869.39,2076.98 3869.39,2113.76 U1.3@3853.7,2129.45 ; C4.2 4925.98,2400 4899.47,2373.49 4899.47,2323.9 4703.51,2127.94 4703.51,2062.89 4687.11,2046.49 4530.06,2046.49 4492.27,2084.28 4492.27,2114.98 4452.96,2154.28 4452.96,2157.11 4436.56,2173.51 4203.89,2173.51 4142.4,2112.02 4005.96,2112.02 3988.53,2129.45 U1.3@3853.7,2129.45
  Bottom Layer w8: v1(3770,3890) 3770,3442.07 3685,3357.07 3685,2725.2 3704,2706.2 3704,2291 v1(3935,2060)
NetQ2_1: Q2.1 R4.1 | length 1792.8
  Top Layer w8: R4.1 3243.07,3113.42 3243.07,3132.67 3535.13,3424.73 3636.03,3424.73 3896.84,3685.53 3896.84,3979.87 4007.91,4090.95 4007.91,4311.25 3993.17,4326 3855.89,4326 3850.35,4320.46 3850.35,4307.13 Q2.1
NetQ3_1: Q3.1 R5.1 | length 694.3
  Top Layer w8: Q3.1 2835,2848.03 2835,2910 3219.65,3294.65 R5.1
NetR1_2: R1.2 USB-C.A5 | length 5760.7
  Top Layer w8: R1.2 2921.77,3170.16 2295,2543.39 2295,1700 2545,1450 5090,1450 5110,1470 5110,1518.37 5098.37,1530 4575,1530 4530,1575 4530,1790 4555,1815 4695,1815 4709.01,1800.99 4709.01,1771.27 USB-C.A5
NetR2_2: R2.2 USB-C.B5 | length 3899.7
  Top Layer w8: R2.2 3290.3,2550.3 3290.3,2442.43 2930,2082.13 2930,1970 3010,1890 3192.07,1890 3667.07,2365 3862.48,2365 3885.24,2342.24 3889.93,2337.55 3889.93,2289.62 3879.17,2278.87 3876.34,2278.87 3862.48,2265 3794.74,2265 3720,2190.26 3720,2042.29 4120.75,1641.54 4311.54,1641.54 4375,1705 4375,1865.31 4379.69,1870 4790,1870 4828.9,1831.1 USB-C.B5
Nivel: MD1.29 P3.3 | length 1002.6
  Top Layer w8: MD1.29@5072.22,3625.2 5379.8,3625.2 5431.5,3573.5 5431.5,3227.35 5375,3170.86 P3.3
RESET: C9.2 MD1.3 Q3.3 R7.1 SW2.2 | length 5991
  Top Layer w8: Q3.3 2919.37,2934.37 3269.61,3284.61 3269.61,3333.66 3263.75,3339.52 3263.75,3410.48 3275,3421.73 3275,3754.5 3218.06,3811.44 3218.06,3818.06 v1(3260,3860) 3233.84,3886.16 3233.84,3935.45 R7.1 ; SW2.2@4158.07,1715 4069.92,1715 3755,2029.92 3755,2165 3775,2185 3877.93,2185 3887.93,2175 3982.58,2175 3996.13,2161.45 4023.43,2161.45 4040.86,2144.02 4129.14,2144.02 4137.35,2152.24 4137.35,2155.06 4238.89,2256.6 4238.89,2423.89 4349.47,2534.47 4349.47,2689.47 C9.2 4380,2710 v1(4450,2710) ; v1(4280,3915) 4290,3915 4338.75,3963.75 4373.9,3963.75 MD1.3
  Bottom Layer w8: v1(3260,3860) 3260,3900 3375,4015 4299.5,4015 4320,3994.5 4320,3955 v1(4280,3915) 4245,3880 4149.69,3880 4147.34,3877.66 4145,3875.31 4144.44,3520.05 ccw(c4181.44,3519.99) 4155.4,3493.7 4435.31,3217.34 4440,3212.66 4440,2845 4450,2835 v1(4450,2710)
RTS: Q3.2 R4.2 U2.14 | length 3566.2
  Top Layer w8: Q3.2 2840.63,2698.45 2350,2207.82 2350,1940 2405,1885 2485,1885 2884.87,2284.87 2884.87,2668.61 3305.35,3089.09 R4.2 3772.75,3095 3787.35,3080.4 3895.4,3080.4 3920,3105 3921,3104 3955.21,3104 3966.55,3092.66 3967.34,3092.66 4040.81,3019.19 4040.81,3013.6 4049.41,3005 U2.14
RXD0: MD1.34 U2.2 | length 2546.4
  Top Layer w8: U2.2 3836.35,3063.6 3898.88,3063.6 v1(3939.88,3067)
  Top Layer w15: v1(4875,3840) 4910.2,3875.2 MD1.34
  Bottom Layer w8: v1(3939.88,3067) 3941.88,3065 4265,3065 4380,2950 4380,2694.69 4399.69,2675 4575,2675 4795,2895 4795,3760 v1(4875,3840)
SD0: MD1.21 R9.2 U4.1 | length 4775.3
  Top Layer w8: v1(2610,4190) 2822.36,4190 2842.83,4169.53 U4.1 ; v1(2865,3820) 2865,3779.69 2873.83,3770.86 2873.83,3750.93 R9.2 ; MD1.21 5165.2,3225.2 v1(5255,3315)
  Bottom Layer w8: v1(2865,3820) 2610,4075 v1(2610,4190) 2675,4255 3810.5,4255 3955.5,4400 5125,4400 5255,4270 v1(5255,3315)
SD1: MD1.22 P1.1 | length 571.3
  Top Layer w8: MD1.22 5032.99,3275.2 5012.71,3254.91 5010.31,3254.91 5003.28,3247.88 5003.28,3152.51 5010.31,3145.48 5230.48,3145.48 P1.1
TXD0: MD1.35 U2.3 | length 2733.1
  Top Layer w8: U2.3 3898.63,3005 3918.63,2985 v1(3930,2985)
  Top Layer w15: v1(4875,3915) 4880.1,3920.1 5049.55,3920.1 MD1.35
  Bottom Layer w8: v1(3930,2985) 4052.54,2985 4092.92,3025.39 4259.11,3025.39 4261.63,3022.87 4263.75,3020.74 4355,2929.5 4355,2669.69 4414.69,2610 4550,2610 4920,2980 4920,3870 v1(4875,3915) ; 4159.78,3029.67 4160.04,3029.68 4160.56,3029.68
VBUS: C8.1 D1.2 LS1.1 P1.3 P2.4 P3.2 P4.2 R3.2 R8.1 R9.1 U3.1 U4.2 U4.5 U5.1 USB-C.A4 USB-C.A9 USB-C.B4 USB-C.B9 | length 8120.9
  Top Layer w8: LS1.1 2420,1975 2412.5,1982.5 2431.95,1982.5 2454.9,2005.45 2454.9,2290.09 2942.06,2777.25 2949.09,2784.28 2949.09,2825.72 2947.09,2827.72 2947.09,2897.09 3690,3640 3710,3640 ; v1(2775,3465) 2814.33,3465 2818.39,3469.07 2839.3,3469.07 R8.1 ; v1(2785,3765) 2796.37,3765 2811.37,3750 R9.1 ; U4.2 2848.66,4149.92 2714.92,4149.92 v1(2670,4105) 2710,4065 2930,4065 2935,4070 2935,4109.55 2935.92,4110.47 U4.5 U4.5@2944.53,4110.47 ; R3.2 3667.75,2810 3787.75,2930 3982.24,2930 4031.84,2880.4 4111.84,2880.4 4114.65,2877.6 5372.4,2877.6 P3.2 5292.24,2792.24 ; v1(3710,3695) 3710,3640 ; U3.1 3710,3640 ; U5.1 3801.81,3409.92 3815.53,3423.64 3815.53,3460.53 3935,3580 v1(3935,3845) 3935,3941.93 D1.2 ; C8.1 4561.24,2721.24 4561.24,2727.18 4575.69,2741.63 4628.37,2741.63 4678.97,2792.24 5292.24,2792.24 ; USB-C.B9 4671.42,1686.1 4710.51,1647 4812,1647 4848.58,1683.58 USB-C.B4 ; v1(4860,1885) 4860.2,1884.8 4860.2,1769.69 USB-C.A9 ; P2.4 5445,1995 5445,2275 5386.97,2333.03 5384.27,2333.03 5384.27,2335.73 P4.2 5364.48,2355.52 5364.48,2376.71 5292.24,2448.95 5292.24,2792.24
pads on no net: MD1.4 MD1.5 MD1.6 MD1.7 MD1.8 MD1.9 MD1.10 MD1.11 MD1.12 MD1.18 MD1.19 MD1.27 MD1.28 MD1.30 MD1.31 MD1.32 MD1.33 MD1.36 MD1.37 P2.2 U2.7 U2.8 U2.9 U2.10 U2.11 U2.12 U2.15 U3.2 U4.3 U4.6 U5.2 USB-C.A8 USB-C.B8 USB-C.Un1 USB-C.Un2

## Polygon pours and split planes (outlines as drawn)
VBUS on Bottom Layer "VBUS_L02_P001" (solid, pour order 1): 2392.5,4507.5 2397.5,4502.5 5177.5,4502.5 5557.5,4122.5 5557.5,1597.5 5377.5,1417.5 2327.5,1417.5 2097.5,1647.5 2097.5,4212.5
GND on Top Layer "GND_L01_P000" (solid, pour order 0): 2395,4500 2400,4495 5180,4495 5560,4115 5560,1590 5380,1410 2330,1410 2100,1640 2100,4205

## Keep-outs
Keep-Out Layer:
  the board outline again, w10

## Other copper
Top Layer:
  pour cut-out: 4960,1830 4965,1825 4965,1465 4530,1465 4510,1485 4510,1830 4965,1830
  pour cut-out: 4335,4400 4340,4395 5110,4395 5110,4115 5115,4110 4330,4110 4330,4395
  pour cut-out: 2985,4053.36 2985,4230 2795,4230 2795,4056.64
Bottom Layer:
  pour cut-out: 4525,1824.98 4990,1824.98 4990,1459.98 4985,1454.98 4980,1459.98 4525,1459.98 4525,1814.98
  pour cut-out: 4330,4405 4340,4395 4340,4100 5095,4100 5110,4115 5110,4395 4335,4395 4325,4405
  pour cut-out: 2800,4065 2985,4065 2985,4225 2980,4230 2795,4230 2795,4070

## Silkscreen, mask and mechanical layers (free items; w line width, h text height)
Top Overlay:
  text "GND" at 5205,3570 h30
  text "VCC" at 5215,3465 h30
  text "CLK" at 5215,3365 h30
  text "SDO" at 5220,3250 h30
  text "Signal" at 5155,2970 h30
  text "VCC" at 5230,2865 h30
  text "GND" at 5235,2765 h30
  text "Signal" at 5155,2445 h30
  text "VCC" at 5230,2330 h30
  text "GND" at 5230,2230 h30
  text "VCC" at 5220,1915 h30
  text "GND" at 5220,1805 h30
  text "-" at 5265,1710 h30
  text "A.Signal" at 5070,1615 h30
  text "Rodrigo Mendoza" at 3010,1421.66 h50
  text "Catherine Batres" at 3900,1420 h50